# Altium PCB ICwT.PcbDoc (part 4 of 4)
Units mm, origin at the board's own origin, x right, y up, seen from the top; angles counter-clockwise.
Board outline 132 x 99.5 mm, 2 copper layers (Top Layer, Bottom Layer); 241 components, 265 nets, 1108 pads, 443 vias.
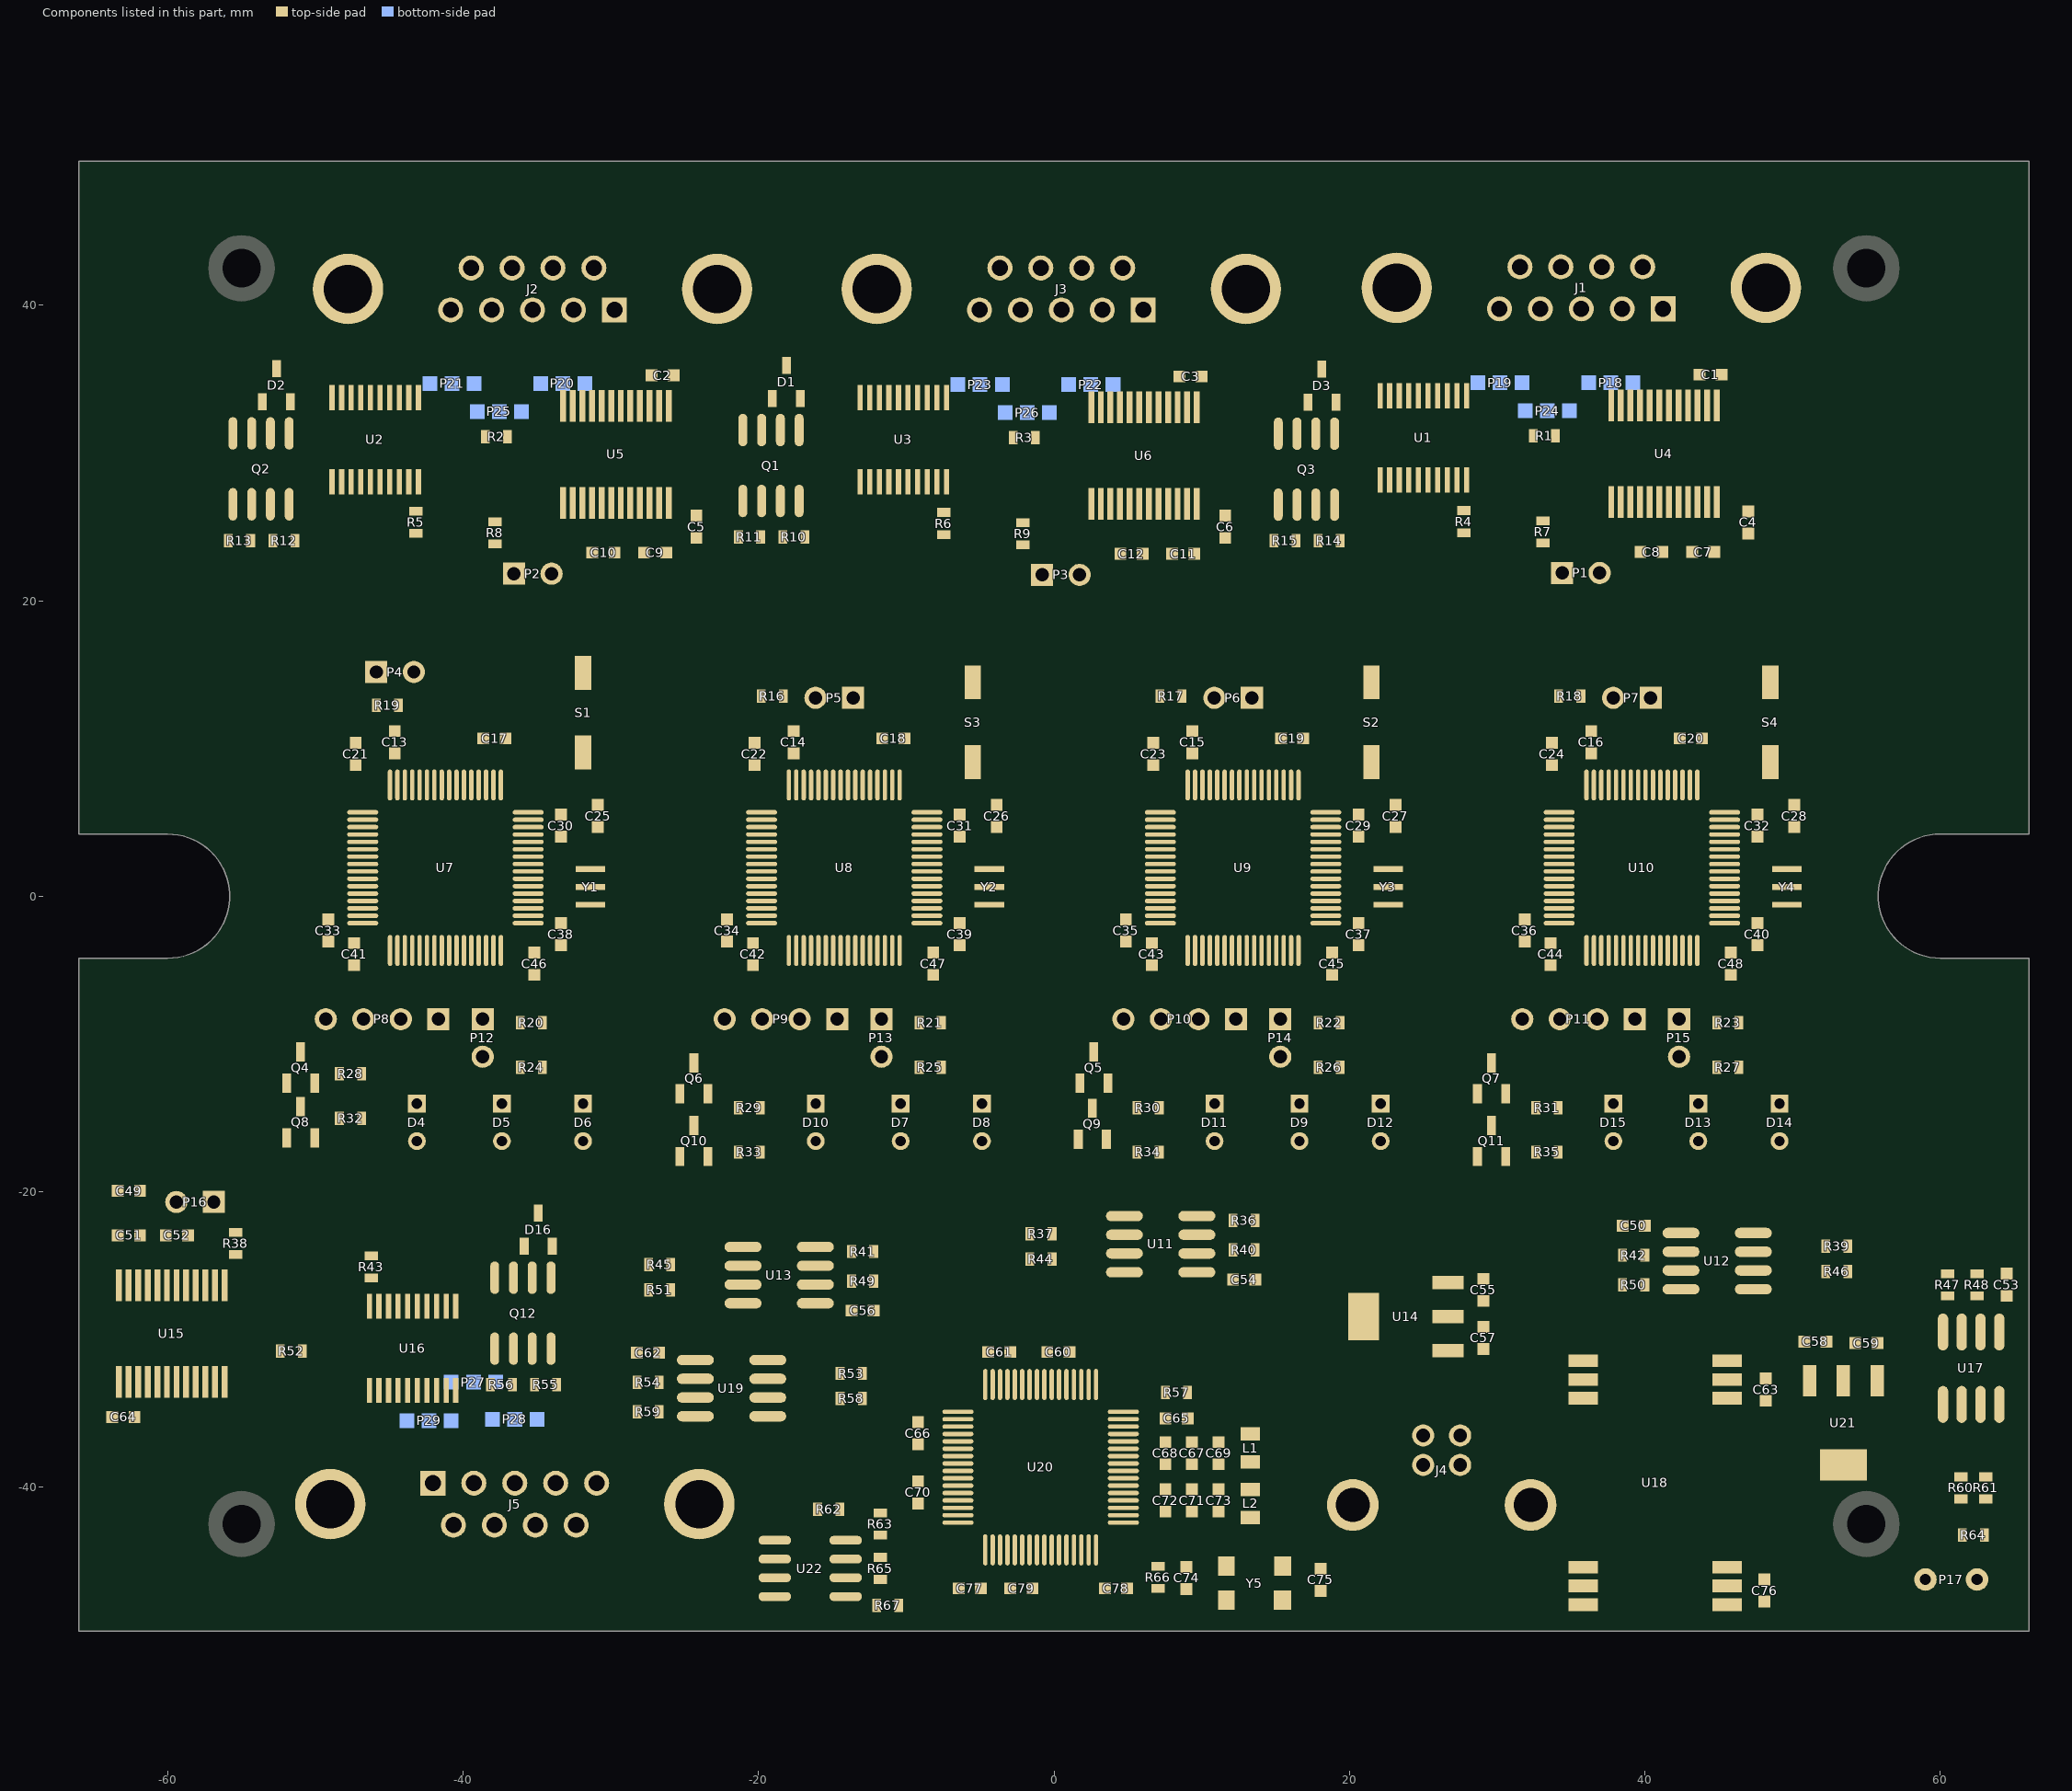
[diagram p4: the components of this part, seen from the top]

## Keep-outs
Keep-Out Layer:
  pour cut-out: 56.9,-49.75 56.85,-49.7 56.85,-41.55 58.625,-39.775 58.625,-32.325 66.175,-32.325 67,-33.15 67,-49.75 56.85,-49.75 56.825,-49.775
  lines w0.2: -66,-49.75 66,-49.75 ; -66,-4.2 -60,-4.2 ccw(c-60,0) -60,4.2 -66,4.2 ; -66,49.75 66,49.75 ; 60,-4.2 66,-4.2 ; 60,4.2 66,4.2 ; 60.007,-4.192 cw(c60.007,0.008) 60.007,4.208
  lines w0.254: -66,-49.75 -66,-4.2 ; -66,4.2 -66,49.75 ; 66,-49.75 66,-4.2 ; 66,4.2 66,49.75

## Other copper
Top Layer:
  region net FT_VCC33: 21.9,-25.1 15.3,-31.7 15.3,-33.7 23.3,-33.7 23.3,-25.1
  region net 3.3VDC_External_iface1: 57.2,-40 57.2,-35.7 49.9,-35.7 47.2,-38.4 47.2,-42.1 52.3,-42.1 52.3,-41.1 53.4,-40

## Silkscreen, mask and mechanical layers (free items; w line width, h text height)
Mechanical 2:
  lines w0.2: -66,-49.75 66,-49.75 ; -66,-4.2 -60,-4.2 ccw(c-60,0) -60,4.2 -66,4.2 ; -66,49.75 66,49.75 ; 60,-4.2 66,-4.2 ; 60,4.2 66,4.2 ; 60.007,-4.192 cw(c60.007,0.008) 60.007,4.208
  lines w0.254: -66,-49.75 -66,-4.2 ; -66,4.2 -66,49.75 ; 66,-49.75 66,-4.2 ; 66,4.2 66,49.75

## Text inside footprints (layer, text, board x,y; h text height)
J1: Top Overlay "9" at 31.104,45.375 h1; Top Overlay "6" at 39.804,45.275 h1
J2: Top Overlay "9" at -39.9,45.3 h1; Top Overlay "6" at -31.2,45.2 h1
J3: Top Overlay "9" at -4.1,45.3 h1; Top Overlay "6" at 4.6,45.2 h1
J5: Top Overlay "9" at -31.9,-45.35 h1 r180; Top Overlay "6" at -40.6,-45.25 h1 r180